# Altium PCB eeg.PcbDoc
Units mil, origin at the board's own origin, x right, y up, seen from the top; angles counter-clockwise.
Board outline 6000 x 4000 mil, 2 copper layers (Top Layer, Bottom Layer); 134 components, 114 nets, 490 pads, 0 vias.
Unrouted connection lines stored in the file: 314.
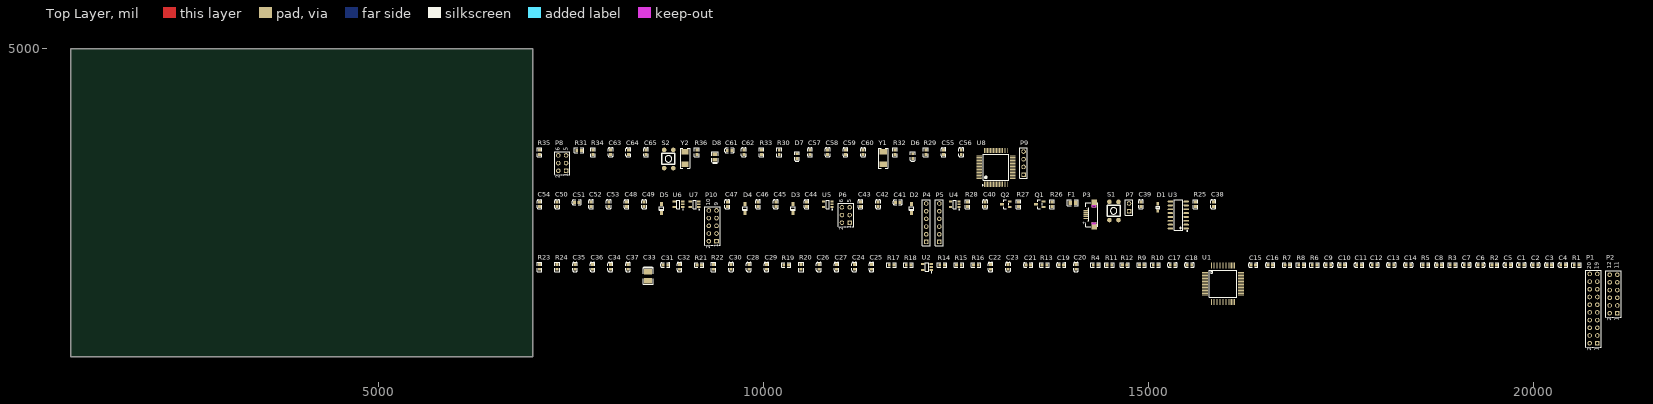
[diagram p0: Top Layer view]
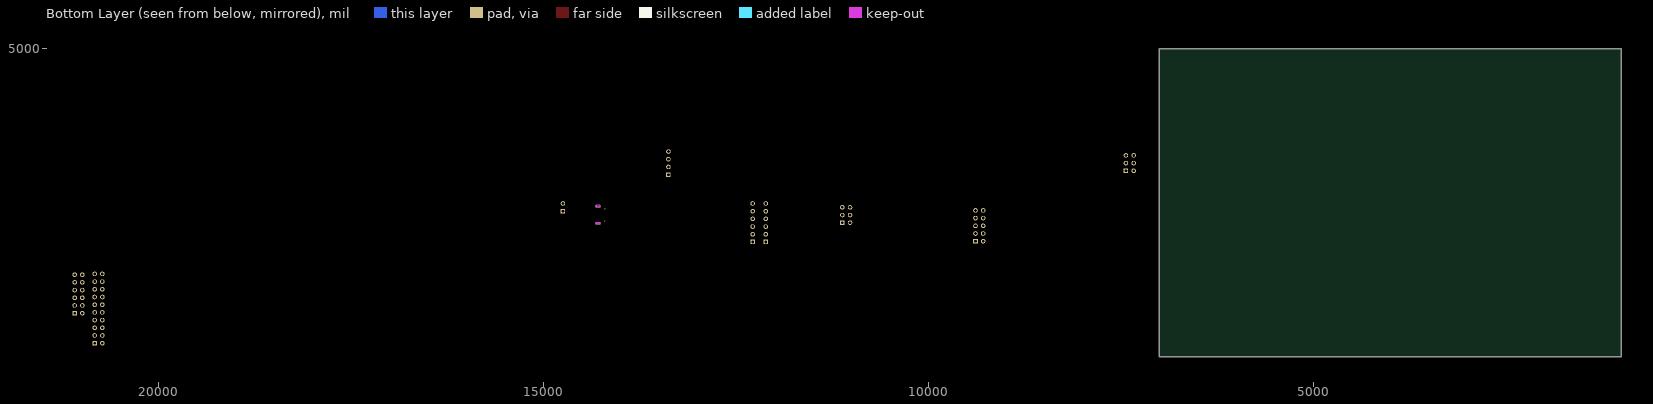
[diagram p1: Bottom Layer view, seen from below]

## Layer stack, top to bottom
Top Solder: solder mask 0.4, Solder Resist, Dk 3.5
Top Layer: signal copper 1.4
Dielectric 1: dielectric 12.6, FR-4, Dk 4.8
Bottom Layer: signal copper 1.4
Bottom Solder: solder mask 0.4, Solder Resist, Dk 3.5

## Board outline
1000,1000 7000,1000 7000,5000 1000,5000

## Design rules (kind name [scope] priority, off if disabled: settings)
Clearance [All] p1: gap=10 ignorepadtopadclearanceinfootprint=FALSE except(0: Arc-Hole Track-Hole SMDPad-Hole THPad-Hole Via-Hole Fill-Hole Poly-Hole Region-Hole Text-Hole)
PolygonConnect [All] p1: connectstyle=Relief reliefconductorwidth=10 reliefentries=4 polygonreliefangle="90 Angle" airgapwidth=10
RoomDefinition stm32f103 [InComponentClass('stm32f103')] p1: confinementstyle=ConfineIn formatcopy=TRUE lockcomponents=FALSE outline 7045,3195 13455,3195 13455,3825 7045,3825
RoomDefinition pwr [InComponentClass('pwr')] p2: confinementstyle=ConfineIn formatcopy=TRUE lockcomponents=FALSE outline 7045,2385 15995,2385 15995,3150 7045,3150
RoomDefinition EEG [InComponentClass('EEG')] p3: confinementstyle=ConfineIn formatcopy=TRUE lockcomponents=FALSE outline 7045,1060 21155,1060 21155,2335 7045,2335
RoutingVias [All] p1: holewidth=28 width=50 viastyle="Through Hole" minholewidth=28 minwidth=50 maxholewidth=28 maxwidth=50
SolderMaskExpansion [All] p1: expansion=4
Width [All] p1: maxlimit=10 minlimit=10 preferedwidth=10
30 further rules are at their usual default settings.

## Classes and differential pairs
component class stm32f103: C55 C56 C57 C58 C59 C60 C61 C62 C63 C64 C65 D6 D7 D8 P8 P9 R29 R30 R31 R32 R33 R34 R35 R36 S2 U8 Y1 Y2
component class pwr: C38 C39 C40 C41 C42 C43 C44 C45 C46 C47 C48 C49 C50 C51 C52 C53 C54 D1 D2 D3 D4 D5 F1 P3 P4 P5 P6 P7 P10 Q1 Q2 R25 R26 R27 R28 S1 U3 U4 U5 U6 U7
component class EEG: C1 C2 C3 C4 C5 C6 C7 C8 C9 C10 C11 C12 C13 C14 C15 C16 C17 C18 C19 C20 C21 C22 C23 C24 C25 C26 C27 C28 C29 C30 C31 C32 C33 C34 C35 C36 C37 P1 P2 R1 R2 R3 R4 R5 R6 R7 R8 R9 R10 R11 R12 R13 R14 R15 R16 R17 R18 R19 R20 R21 R22 R23 R24 U1 U2

## Components (designator, comment, footprint, x,y, rotation, side; value= is the part's Value field where it differs from the comment)
C1 "1uF 50V" 0603_C 19850,2190 r0 top
C2 "100nF 50V" 0603_C 20030,2190 r0 top
C3 "1uF 50V" 0603_C 20210,2190 r0 top
C4 "100nF 50V" 0603_C 20390,2190 r0 top
C5 "1uF 50V" 0603_C 19675,2190 r0 top
C6 "4.7nF 50V" 0603_C 19315,2190 r0 top
C7 "100nF 50V" 0603_C 19135,2190 r0 top
C8 "1.5nF" 0603_C 18780,2190 r0 top
C9 "1uF 50V" 0603_C 17340,2190 r0 top
C10 "100nF 50V" 0603_C 17520,2190 r0 top
C11 "1uF 50V" 0603_C 17740,2190 r0 top
C12 "100nF 50V" 0603_C 17940,2190 r0 top
C13 "1uF 50V" 0603_C 18160,2190 r0 top
C14 "100nF 50V" 0603_C 18380,2190 r0 top
C15 "4.7nF 50V" 0603_C 16365,2190 r0 top
C16 "4.7nF 50V" 0603_C 16585,2190 r0 top
C17 "4.7nF 50V" 0603_C 15315,2190 r0 top
C18 "4.7nF 50V" 0603_C 15535,2190 r0 top
C19 "4.7nF 50V" 0603_C 13870,2190 r0 top
C20 "4.7nF 50V" 0603_C 14060,2165 r90 top
C21 "1uF (105) 10% 50V" 0603_C 13440,2190 r0 top
C22 "4.7nF 50V" 0603_C 12950,2165 r90 top
C23 "4.7nF 50V" 0603_C 13180,2165 r90 top
C24 "4.7nF 50V" 0603_C 11180,2165 r90 top
C25 "4.7nF 50V" 0603_C 11405,2165 r90 top
C26 "4.7nF 50V" 0603_C 10720,2165 r90 top
C27 "4.7nF 50V" 0603_C 10950,2165 r90 top
C28 "1uF 50V" 0603_C 9810,2165 r90 top
C29 "1uF 50V" 0603_C 10040,2165 r90 top
C30 "1uF (105) 10% 50V" 0603_C 9580,2165 r90 top
C31 "4.7nF 50V" 0603_C 8725,2190 r0 top
C32 "4.7nF 50V" 0603_C 8910,2165 r90 top
C33 "100uF (107) ±10% 6.3V" CASE-B_3528 8500,2045 r90 top
C34 "10uF" 0603_C 8010,2165 r90 top
C35 "4.7nF 50V" 0603_C 7550,2165 r90 top
C36 "4.7nF 50V" 0603_C 7780,2165 r90 top
C37 "100nF 50V" 0603_C 8240,2165 r90 top
C38 "10uF (106) 10% 10V" 0603_C 15845,2980 r90 top
C39 "100nF (104) 10% 50V" 0603_C 14905,2980 r90 top
C40 "100nF (104) 10% 50V" 0603_C 12880,2980 r90 top
C41 "1uF" 0603_C 11745,3005 r0 top
C42 "1uF" 0603_C 11490,2980 r90 top
C43 "1nF" 0603_C 11260,2980 r90 top
C44 "1uF" 0603_C 10560,2980 r90 top
C45 "1uF" 0603_C 10160,2980 r90 top
C46 "1nF" 0603_C 9930,2980 r90 top
C47 "1uF" 0603_C 9530,2980 r90 top
C48 "1uF" 0603_C 8220,2980 r90 top
C49 "10nF" 0603_C 8450,2980 r90 top
C50 "1uF" 0603_C 7320,2980 r90 top
C51 "10nF" 0603_C 7575,3005 r0 top
C52 "1uF" 0603_C 7760,2980 r90 top
C53 "10nF" 0603_C 7990,2980 r90 top
C54 "1nF" 0603_C 7090,2980 r90 top
C55 "10uF  10V" 0603_C 12340,3655 r90 top
C56 "100nF  50V" 0603_C 12570,3655 r90 top
C57 "100nF" 0603_C 10605,3655 r90 top
C58 "100nF" 0603_C 10835,3655 r90 top
C59 "100nF" 0603_C 11065,3655 r90 top
C60 "100nF" 0603_C 11295,3655 r90 top
C61 "22pF" 0603_C 9560,3680 r0 top
C62 "22pF" 0603_C 9745,3655 r90 top
C63 "100nF  50V" 0603_C 8015,3655 r90 top
C64 "22pF" 0603_C 8245,3655 r90 top
C65 "22pF" 0603_C 8475,3655 r90 top
D1 "1N4148WS T4" SOD-323 15125,2940 r90 top
D2 "MMSZ4685T1G(3.6V)" SOD-123 11925,2925 r90 top
D3 "MMSZ4683T1G(3V)" SOD-123 10385,2925 r90 top
D4 "B5819W  SL" SOD-123 9760,2925 r90 top
D5 "MMSZ4683T1G(3V)" SOD-123 8675,2925 r90 top
D6 "绿灯 0603" 0603_LED_S1 11940,3605 r90 top
D7 "绿灯 0603" 0603_LED_S1 10435,3605 r90 top
D8 "红灯 0805" 0805_LED_S1 9370,3595 r90 top
F1 "Fuse 1A" 0805_R 14020,3000 r0 top
P1 "Header 10X2" HDR2X10 20835,1175 r90 top
P2 "Header 6X2" HDR2X6 21095,1565 r90 top
P3 "USB" MICRO-USB 14275,2845 r90 top
P4 "ATK_ESP8266_CON" HDR1X6 12115,2490 r90 top
P5 "HC-05_CON" HDR1X6 12285,2490 r90 top
P6 "Header 3X2" HDR2X3 11120,2740 r90 top
P7 "Header 2" HDR1X2 14750,2890 r90 top
P8 "Header 3X2" HDR2X3 7435,3415 r90 top
P9 "SWD" HDR1X4 13380,3365 r90 top
P10 "Header 5X2" HDR2X5 9390,2500 r90 top
Q1 "SS8050 Y1" SOT-23(SOT-23-3) 13590,2980 r0 top
Q2 "SS8550 Y2" SOT-23(SOT-23-3) 13150,2980 r0 top
R1 "0Ω" 0603_R 20565,2190 r0 top
R2 "4.99KΩ (4991) ±1%" 0603_R 19495,2190 r0 top
R3 "1MΩ" 0603_R 18955,2190 r0 top
R4 "10KΩ" 0603_R 14315,2190 r0 top
R5 "10KΩ" 0603_R 18600,2190 r0 top
R6 "100KΩ" 0603_R 17160,2190 r0 top
R7 "4.99KΩ" 0603_R 16805,2190 r0 top
R8 "4.99KΩ" 0603_R 16985,2190 r0 top
R9 "4.99KΩ" 0603_R 14915,2190 r0 top
R10 "4.99KΩ" 0603_R 15095,2190 r0 top
R11 "4.99KΩ" 0603_R 14495,2190 r0 top
R12 "4.99KΩ" 0603_R 14695,2190 r0 top
R13 "10KΩ" 0603_R 13650,2190 r0 top
R14 "4.99KΩ" 0603_R 12320,2190 r0 top
R15 "4.99KΩ" 0603_R 12540,2190 r0 top
R16 "10KΩ" 0603_R 12760,2190 r0 top
R17 "4.99KΩ" 0603_R 11665,2190 r0 top
R18 "4.99KΩ" 0603_R 11885,2190 r0 top
R19 "4.99KΩ" 0603_R 10295,2190 r0 top
R20 "4.99KΩ" 0603_R 10490,2165 r90 top
R21 "4.99KΩ" 0603_R 9165,2190 r0 top
R22 "4.99KΩ" 0603_R 9350,2165 r90 top
R23 "4.99KΩ" 0603_R 7090,2165 r90 top
R24 "4.99KΩ" 0603_R 7320,2165 r90 top
R25 "10KΩ" 0603_R 15615,2980 r90 top
R26 "1KΩ (1001) ±1%" 0603_R 13750,2980 r90 top
R27 "1KΩ (1001) ±1%" 0603_R 13315,2980 r90 top
R28 "1KΩ (1001) ±1%" 0603_R 12650,2980 r90 top
R29 "10Ω (10R0) ±1%" 0603_R 12110,3655 r90 top
R30 "1MΩ" 0603_R 10205,3655 r90 top
R31 "10K" 0603_R 7605,3680 r0 top
R32 "510Ω" 0603_R 11710,3655 r90 top
R33 "510Ω" 0603_R 9975,3655 r90 top
R34 "10KΩ" 0603_R 7785,3655 r90 top
R35 "10KΩ" 0603_R 7090,3655 r90 top
R36 "1KΩ" 0603_R 9135,3655 r90 top
S1 "SW-PB" key_4.5*4.5*3.8 14495,2775 r90 top
S2 "SW-PB" key_4.5*4.5*3.8 8710,3450 r90 top
U1 "ADS1299" ADS1299 15665,2195 r0 top
U2 "OPA376DBV" SOT-23-5 12125,2165 r0 top
U3 "CH340G" SOIC-16_150mil 15390,2840 r90 top
U4 "TPS71733DCKR" SOT-23-5 12485,2980 r0 top
U5 "TPS73225" SOT-23-5 10835,2980 r0 top
U6 "TPS60403" SOT-23-5 8895,2980 r0 top
U7 "TPS72325" SOT-23-5 9105,2980 r0 top
U8 "STM32F103RCT6" LQFP-64_10x10x05P 13020,3460 r0 top
Y1 "8MHz ±20ppm 20pF" SMD-5032_2P 11555,3580 r90 top
Y2 "32.768KHz" SMD-5032_2P 8980,3580 r90 top

## Footprints (in the part's own frame and the unit in brackets; to place one, negate y for a bottom-side part, rotate by r counter-clockwise, add the part's x,y. Pads: shape width x height; smd on the part's side, far side on the other; paste and mask are expansions set on the pad)
0603_C [mm]
  rect 0.93x0.98 smd: 1(-0.77,0) 2(0.77,0)
  silkscreen extent -1.53,-0.79 1.54,0.79, body extent -0.8,-0.4 0.8,0.4, height 0.3
0603_LED_S1 [mm]
  rect 0.93x0.98 smd: A(0.77,0) K(-0.77,0)
  silkscreen extent -1.98,-0.79 1.54,0.79, body extent -0.8,-0.4 0.8,0.4, height 0.6
0603_R [mm]
  rect 0.93x0.98 smd: 1(-0.77,0) 2(0.77,0)
  silkscreen extent -1.53,-0.79 1.54,0.79, body extent -0.85,-0.4 0.85,0.4, height 0.56
0805_LED_S1 [mm]
  rect 1.16x1.47 smd: A(0.89,0) K(-0.89,0)
  silkscreen extent -2.24,-1.04 1.77,1.03, body extent -1.01,-0.62 1.01,0.62, height 1.1
0805_R [mm]
  rect 1.16x1.47 smd: 1(-0.89,0) 2(0.89,0)
  silkscreen extent -1.77,-1.04 1.77,1.03, body extent -1,-0.62 1,0.63, height 0.49
ADS1299 [mm]
  oval 2x0.22 smd: 1(1.778,-2.54)
  rect 2x0.22 smd: 2(1.778,-3.04) 3(1.778,-3.54) 4(1.778,-4.04) 5(1.778,-4.54) 6(1.778,-5.04) 7(1.778,-5.54) 8(1.778,-6.04) 9(1.778,-6.54) 10(1.778,-7.04) 11(1.778,-7.54) 12(1.778,-8.04) 13(1.778,-8.54) 14(1.778,-9.04) 15(1.778,-9.54) 16(1.778,-10.04) 33(13.778,-10.04) 34(13.778,-9.54) 35(13.778,-9.04) 36(13.778,-8.54) 37(13.778,-8.04) 38(13.778,-7.54) 39(13.778,-7.04) 40(13.778,-6.54) 41(13.778,-6.04) 42(13.778,-5.54) 43(13.778,-5.04) 44(13.778,-4.54) 45(13.778,-4.04) 46(13.778,-3.54) 47(13.778,-3.04) 48(13.778,-2.54)
  rect 0.22x2 smd: 17(4.028,-12.29) 18(4.528,-12.29) 19(5.028,-12.29) 20(5.528,-12.29) 21(6.028,-12.29) 22(6.528,-12.29) 23(7.028,-12.29) 24(7.528,-12.29) 25(8.028,-12.29) 26(8.528,-12.29) 27(9.028,-12.29) 28(9.528,-12.29) 29(10.028,-12.29) 30(10.528,-12.29) 31(11.028,-12.29) 32(11.528,-12.29) 49(11.528,-0.29) 50(11.028,-0.29) 51(10.528,-0.29) 52(10.028,-0.29) 53(9.528,-0.29) 54(9.028,-0.29) 55(8.528,-0.29) 56(8.028,-0.29) 57(7.528,-0.29) 58(7.028,-0.29) 59(6.528,-0.29) 60(6.028,-0.29) 61(5.528,-0.29) 62(5.028,-0.29) 63(4.528,-0.29) 64(4.028,-0.29)
  silkscreen extent 3.31,-10.75 12.24,-1.83
CASE-B_3528 [mm]
  rect 1.8x2.6 smd: 1(1.5,0) 2(-1.5,0)
  silkscreen extent -2.73,-1.65 3.16,1.65, body extent -1.85,-1.47 1.85,1.46, height 2.03
HDR1X2 [mm] "Connector; Header; 2 Position"
  rect 1.5x1.5 hole 0.9: 1(0,0)
  round 1.5 hole 0.9: 2(2.54,0)
  silkscreen extent -1.27,-1.27 3.81,1.27
HDR1X4 [mm] "Connector; Header; 4 Position"
  rect 1.5x1.5 hole 0.9: 1(0,0)
  round 1.5 hole 0.9: 2(2.54,0) 3(5.08,0) 4(7.62,0)
  silkscreen extent -1.27,-1.27 8.89,1.27
HDR1X6 [mm] "Connector; Header; 6 Position"
  rect 1.5x1.5 hole 0.9: 1(0,0)
  round 1.5 hole 0.9: 2(2.54,0) 3(5.08,0) 4(7.62,0) 5(10.16,0) 6(12.7,0)
  silkscreen extent -1.27,-1.27 13.97,1.27
HDR2X3 [mm] "Connector; Header; 3x2 Position"
  rect 1.5x1.5 hole 0.9: 1(0,0)
  round 1.5 hole 0.9: 2(0,2.54) 3(2.54,0) 4(2.54,2.54) 5(5.08,0) 6(5.08,2.54)
  silkscreen extent -1.27,-1.27 6.35,3.81
HDR2X5 [mm] "Connector; Header; 5x2 Position"
  rect 1.5x1.5 hole 0.9: 1(0,0)
  round 1.5 hole 0.9: 2(0,2.54) 3(2.54,0) 4(2.54,2.54) 5(5.08,0) 6(5.08,2.54) 7(7.62,0) 8(7.62,2.54) 9(10.16,0) 10(10.16,2.54)
  silkscreen extent -1.27,-1.27 11.43,3.81
HDR2X6 [mm] "Connector; Header; 6x2 Position"
  rect 1.5x1.5 hole 0.9: 1(0,0)
  round 1.5 hole 0.9: 2(0,2.54) 3(2.54,0) 4(2.54,2.54) 5(5.08,0) 6(5.08,2.54) 7(7.62,0) 8(7.62,2.54) 9(10.16,0) 10(10.16,2.54) 11(12.7,0) 12(12.7,2.54)
  silkscreen extent -1.27,-1.27 13.97,3.81
HDR2X10 [mm] "Connector; Header; 10x2 Position"
  rect 1.5x1.5 hole 0.9: 1(0,0)
  round 1.5 hole 0.9: 2(0,2.54) 3(2.54,0) 4(2.54,2.54) 5(5.08,0) 6(5.08,2.54) 7(7.62,0) 8(7.62,2.54) 9(10.16,0) 10(10.16,2.54) 11(12.7,0) 12(12.7,2.54) 13(15.24,0) 14(15.24,2.54) 15(17.78,0) 16(17.78,2.54) 17(20.32,0) 18(20.32,2.54) 19(22.86,0) 20(22.86,2.54)
  silkscreen extent -1.27,-1.27 24.13,3.81
key_4.5*4.5*3.8 [mm]
  round 1.5 smd: 1(0,0) 2(6,0) ""(0,-3) ""(6,-3)
  silkscreen extent 1.27,-3.56 4.83,0.76
LQFP-64_10x10x05P [mm]
  oval 0.28x1.8 smd mask+0.051: 1(-3.75,-5.55) 2(-3.25,-5.55) 3(-2.75,-5.55) 4(-2.25,-5.55) 5(-1.75,-5.55) 6(-1.25,-5.55) 7(-0.75,-5.55) 8(-0.25,-5.55) 9(0.25,-5.55) 10(0.75,-5.55) 11(1.25,-5.55) 12(1.75,-5.55) 13(2.25,-5.55) 14(2.75,-5.55) 15(3.25,-5.55) 16(3.75,-5.55) 33(3.75,5.55) 34(3.25,5.55) 35(2.75,5.55) 36(2.25,5.55) 37(1.75,5.55) 38(1.25,5.55) 39(0.75,5.55) 40(0.25,5.55) 41(-0.25,5.55) 42(-0.75,5.55) 43(-1.25,5.55) 44(-1.75,5.55) 45(-2.25,5.55) 46(-2.75,5.55) 47(-3.25,5.55) 48(-3.75,5.55)
  oval 1.8x0.28 smd mask+0.051: 17(5.55,-3.75) 18(5.55,-3.25) 19(5.55,-2.75) 20(5.55,-2.25) 21(5.55,-1.75) 22(5.55,-1.25) 23(5.55,-0.75) 24(5.55,-0.25) 25(5.55,0.25) 26(5.55,0.75) 27(5.55,1.25) 28(5.55,1.75) 29(5.55,2.25) 30(5.55,2.75) 31(5.55,3.25) 32(5.55,3.75) 49(-5.55,3.75) 50(-5.55,3.25) 51(-5.55,2.75) 52(-5.55,2.25) 53(-5.55,1.75) 54(-5.55,1.25) 55(-5.55,0.75) 56(-5.55,0.25) 57(-5.55,-0.25) 58(-5.55,-0.75) 59(-5.55,-1.25) 60(-5.55,-1.75) 61(-5.55,-2.25) 62(-5.55,-2.75) 63(-5.55,-3.25) 64(-5.55,-3.75)
  silkscreen extent -4.55,-6.05 4.25,4.25
MICRO-USB [mm]
  rect 0.4x1.55 smd: 1(-1.3,2.2) 2(-0.65,2.2) 3(0,2.2) 4(0.65,2.2) 5(1.3,2.2)
  rect 1.8x1.9 smd: 6(-4.05,-0.55) 6(4.05,-0.55)
  rect 0.8x1.5 hole 0.4 slot 1 at 90 deg: 6(-2.825,-0.5) 6(2.825,-0.5)
  round 0.5 hole 0.5 unplated: ""(-2,1.65) ""(2,1.65)
  Keep-Out Layer lines w0.127: -3.054,0.075 -2.596,0.075 -2.596,-1.043 -3.054,-1.043 -3.054,0.075 ; 2.596,0.075 3.054,0.075 3.054,-1.043 2.596,-1.043 2.596,0.075
  silkscreen extent -4.05,-1.8 4,2.3, body extent -4.03,-3.3 4.03,2.28, height 3.13
SMD-5032_2P [mm]
  rect 1.9x2.4 smd: 1(-2.05,0) 2(2.05,0)
  silkscreen extent -3.32,-1.6 3.32,1.6
SOD-123 [mm]
  rect 1.25x1 smd: 1(1.475,0) 2(-1.475,0)
  silkscreen extent -0.5,-0.7 0.5,0.7, body extent -1.85,-0.77 1.85,0.78, height 1.35
SOD-323 [mm]
  rect 1x0.83 smd: 1(1.18,0) 2(-1.18,0)
  silkscreen extent -0.4,-0.6 0.4,0.6, body extent -1.35,-0.62 1.35,0.63, height 1.1
SOIC-16_150mil [mm]
  oval 0.6x1.8 smd: 1(-4.445,-2.6) 2(-3.175,-2.6) 3(-1.905,-2.6) 4(-0.635,-2.6) 5(0.635,-2.6) 6(1.905,-2.6) 7(3.175,-2.6) 8(4.445,-2.6) 9(4.445,2.6) 10(3.175,2.6) 11(1.905,2.6) 12(0.635,2.6) 13(-0.635,2.6) 14(-1.905,2.6) 15(-3.175,2.6) 16(-4.445,2.6)
  silkscreen extent -5.4,-3.05 4.97,1.4
SOT-23(SOT-23-3) [mm]
  rect 1.25x0.7 smd: 1(1.25,-0.95) 2(1.25,0.95) 3(-1.25,0)
  silkscreen extent -0.65,-1.46 0.9,1.46, body extent -1.5,-1.5 1.5,1.5, height 1.3
SOT-23-5 [mm]
  rect 1.1x0.6 smd: 1(1.4,-0.95) 2(1.4,0) 3(1.4,0.95) 4(-1.4,0.95) 5(-1.4,-0.95)
  silkscreen extent -0.5,-1.87 1.63,1.4

## Part data
C1 C2 C3 C4 C5 C7 C8 C9 C10 C11 C12 C13 C14 C28 C29 C37 C49 C51 C53: library part "0603 10nF (103) 10% 50V", "贴片电容", Package=0603, SuppliersPartNumber=C57112, ComponentLink1Description=供应商链接, ComponentLink1URL=http://www.szlcsc.com/product/details_58143.html, Supplier=LC
C6 C15 C16 C17 C18 C19 C20 C22 C23 C24 C25 C26 C27 C31 C32 C35 C36: library part "0603 4.7nF (472) 10% 50V", "贴片电容", Package=0603, SuppliersPartNumber=C53987, ComponentLink1Description=供应商链接, ComponentLink1URL=http://www.szlcsc.com/product/details_55004.html, Supplier=LC
C21 C30 C41 C42 C44 C45 C47 C48 C50 C52: library part "0603 1uF (105) 10% 50V", "贴片电容", Package=0603, SuppliersPartNumber=C15849, ComponentLink1Description=供应商链接, ComponentLink1URL=http://www.szlcsc.com/product/details_16531.html, Supplier=LC
C33: library part "3528 100uF (107) 10% 6.3V", "钽电容", Package=3528, SuppliersPartNumber=C16133, ComponentLink1Description=供应商链接, ComponentLink1URL=http://www.szlcsc.com/product/details_16815.html, Supplier=LC
C34 C38 C55: library part "0603 10uF (106) 10% 10V", "贴片电容", Package=0603, SuppliersPartNumber=C19702, ComponentLink1Description=供应商链接, ComponentLink1URL=http://www.szlcsc.com/product/details_20411.html, Supplier=LC
C39 C40 C56 C57 C58 C59 C60 C63: library part "0603 100nF (104) 10% 50V", "贴片电容", Package=0603, SuppliersPartNumber=C14663, ComponentLink1Description=供应商链接, ComponentLink1URL=http://www.szlcsc.com/product/details_15331.html, Supplier=LC
C43 C46 C54: library part "0603 1nF (102) 10% 50V", "贴片电容", Package=0603, SuppliersPartNumber=C1588, ComponentLink1Description=供应商链接, ComponentLink1URL=http://www.szlcsc.com/product/details_1940.html, Supplier=LC
C61 C62: library part "0603 22pF (220) 5% 50V", "贴片电容", Package=0603, SuppliersPartNumber=C1653, ComponentLink1Description=供应商链接, ComponentLink1URL=http://www.szlcsc.com/product/details_2005.html, Supplier=LC
C64 C65: library part "0603 10pF (100) 5% 50V", "贴片电容", Package=0603, SuppliersPartNumber=C1634, ComponentLink1Description=供应商链接, ComponentLink1URL=http://www.szlcsc.com/product/details_1986.html, Supplier=LC
D1: library part "SOD-323 1N4148WS T4", "二极管", Package=SOD-323, SuppliersPartNumber=C2128, ComponentLink1Description=供应商链接, ComponentLink1URL=http://www.szlcsc.com/product/details_2485.html, Supplier=LC
D2 D3 D4 D5: library part "SOD-123 B5819W  SL", "肖特基二极管", Package=SOD-123, SuppliersPartNumber=C8598, ComponentLink1Description=供应商链接, ComponentLink1URL=http://www.szlcsc.com/product/details_9093.html, Supplier=LC
D6 D7: library part "0603 绿灯", "发光二极管", Package=0603, SuppliersPartNumber=C72043, ComponentLink1Description=供应商链接, ComponentLink1URL=http://www.szlcsc.com/product/details_73152.html, Supplier=LC
D8: library part "0805 红灯", "发光二极管", Package=0805, SuppliersPartNumber=C2295, ComponentLink1Description=供应商链接, ComponentLink1URL=http://www.szlcsc.com/product/details_2668.html, Supplier=LC
F1: library part "Fuse 2", "Fuse", LatestRevisionDate=17-Jul-2002, LatestRevisionNote="Re-released for DXP Platform.", PackageDescription="Thru-Hole; 2 Leads", PackageReference=PIN-W2/E2.8, Published=8-Jun-2000, Publisher="Altium Limited"
P1: "Header, 10-Pin, Dual row", LatestRevisionDate=17-Jul-2002, LatestRevisionNote="Re-released for DXP Platform.", Publisher="Altium Limited"
P2: "Header, 6-Pin, Dual row", LatestRevisionDate=17-Jul-2002, LatestRevisionNote="Re-released for DXP Platform.", Publisher="Altium Limited"
P3: library part "Header 5", "Header, 5-Pin", LatestRevisionDate=17-Jul-2002, LatestRevisionNote="Re-released for DXP Platform.", Publisher="Altium Limited"
P4 P5: library part "Header 6", "Header, 6-Pin", LatestRevisionDate=17-Jul-2002, LatestRevisionNote="Re-released for DXP Platform.", Publisher="Altium Limited"
P6 P8: "Header, 3-Pin, Dual row", LatestRevisionDate=17-Jul-2002, LatestRevisionNote="Re-released for DXP Platform.", Publisher="Altium Limited"
P7: "Header, 2-Pin", LatestRevisionDate=17-Jul-2002, LatestRevisionNote="Re-released for DXP Platform.", Publisher="Altium Limited"
P9: library part "Header 4", "Header, 4-Pin", LatestRevisionDate=17-Jul-2002, LatestRevisionNote="Re-released for DXP Platform.", Publisher="Altium Limited"
P10: "Header, 5-Pin, Dual row", LatestRevisionDate=17-Jul-2002, LatestRevisionNote="Re-released for DXP Platform.", Publisher="Altium Limited"
Q1: library part "SOT-23 SS8050 Y1", "三极管", Package=SOT-23, SuppliersPartNumber=C2150, ComponentLink1Description=供应商链接, ComponentLink1URL=http://www.szlcsc.com/product/details_2507.html, Supplier=LC
Q2: library part "SOT-23 SS8550 Y2", "三极管", Package=SOT-23, SuppliersPartNumber=C8542, ComponentLink1Description=供应商链接, ComponentLink1URL=http://www.szlcsc.com/product/details_9037.html, Supplier=LC
R1 R3 R6: library part "0603 100KΩ (1003) 1%", "贴片电阻", Package=0603, SuppliersPartNumber=C25803, ComponentLink1Description=供应商链接, ComponentLink1URL=http://www.szlcsc.com/product/details_26546.html, Supplier=LC
R2 R7 R8 R9 R10 R11 R12 R14 R15 R17 R18 R19 R20 R21 R22 R23 R24: library part "0603 4.99KΩ (4991) 1%", "贴片电阻", Package=0603, SuppliersPartNumber=C23046, ComponentLink1Description=供应商链接, ComponentLink1URL=http://www.szlcsc.com/product/details_23773.html, Supplier=LC
R4 R5 R13 R16 R34 R35: library part "0603 10KΩ (1002) 1%", "贴片电阻", Package=0603, SuppliersPartNumber=C25804, ComponentLink1Description=供应商链接, ComponentLink1URL=http://www.szlcsc.com/product/details_26547.html, Supplier=LC
R25 R26 R27 R28 R36: library part "0603 1KΩ (1001) 1%", "贴片电阻", Package=0603, SuppliersPartNumber=C21190, ComponentLink1Description=供应商链接, ComponentLink1URL=http://www.szlcsc.com/product/details_21904.html, Supplier=LC
R29 R31: library part "0603 10Ω (10R0) 1%", "贴片电阻", Package=0603, SuppliersPartNumber=C22859, ComponentLink1Description=供应商链接, ComponentLink1URL=http://www.szlcsc.com/product/details_23586.html, Supplier=LC
R30: library part "0603 1.2MΩ (1204) 1%", "贴片电阻", Package=0603, SuppliersPartNumber=C22766, ComponentLink1Description=供应商链接, ComponentLink1URL=http://www.szlcsc.com/product/details_23493.html, Supplier=LC
R32 R33: library part "0603 510Ω (5100) 1%", "贴片电阻", Package=0603, SuppliersPartNumber=C23193, ComponentLink1Description=供应商链接, ComponentLink1URL=http://www.szlcsc.com/product/details_23920.html, Supplier=LC
S1 S2: "Switch", LatestRevisionDate=17-Jul-2002, LatestRevisionNote="Re-released for DXP Platform.", PackageDescription="Switch; 2 Leads", PackageReference=SPST-2, Published=24-Mar-1999, Publisher="Altium Limited"
U3: library part CH340G_[C14267], "USB", Package=SOIC-16_150mil, SuppliersPartNumber=C14267, ComponentLink1Description=供应商链接, ComponentLink1URL=http://www.szlcsc.com/product/details_14927.html, Supplier=LC
U8: "ARM", Package=LQFP-64_10x10x05P, SuppliersPartNumber=C8323, ComponentLink1Description=供应商链接, ComponentLink1URL=http://www.szlcsc.com/product/details_8815.html, Supplier=LC
Y1 Y2: library part "SMD-5032_2P 8MHz 20ppm 20pF", "贴片晶振", Package=SMD-5032_2P, SuppliersPartNumber=C115962, ComponentLink1Description=供应商链接, ComponentLink1URL=http://www.szlcsc.com/product/details_117214.html, Supplier=LC

## Nets (pads, with @x,y where several pads share a name; then routed paths per layer and width w, separated by ;. In a path a pad name is that pad's centre, name@x,y a point inside that pad or via, vN(x,y) a via of type N, cw(c..) or ccw(c..) an arc to the next point about the centre after c; other vN are vias at no path point)
+5V: C38.1 C39.1 U3.16
AGND: C6.1 C9.2 C10.2 C11.2 C12.2 C15.1 C16.1 C17.2 C18.2 C19.1 C20.1 C21.2 C22.2 C23.2 C24.1 C25.1 C26.2 C27.2 C30.1 C31.1 C32.1 C35.2 C36.2 C38.2 C39.2 C40.1 C41.1 C42.1 C44.1 C45.1 C46.1 C48.2 C49.1 C50.2 C51.1 C52.2 C53.1 C54.1 C55.1 C56.1 C57.1 C58.1 C59.1 C60.1 C61.1 C62.1 C63.1 C64.1 C65.1 D3.1 D5.2 D8.K P1.1 P1.2 P3.5 P4.2 P5.4 P7.2 P9.4 P10.2 P10.4 P10.6 P10.8 R1.2 R29.2 S2.2 U3.1 U4.2 U5.2 U6.4 U7.1 U8.12 U8.18 U8.31 U8.47 U8.63
AIN1N: C17.1 R9.2 U1.15
AIN1P: C15.2 R7.2 U1.16
AIN2N: C18.1 R10.2 U1.13
AIN2P: C16.2 R8.2 U1.14
AIN3N: C22.1 R14.2 U1.11
AIN3P: C19.2 R11.2 U1.12
AIN4N: C23.1 R15.2 U1.9
AIN4P: C20.2 R12.2 U1.10
AIN5N: C26.1 R19.2 U1.7
AIN5P: C24.2 R17.2 U1.8
AIN6N: C27.1 R20.2 U1.5
AIN6P: C25.2 R18.2 U1.6
AIN7N: C35.1 R23.2 U1.3
AIN7P: C31.2 R21.2 U1.4
AIN8N: C36.1 R24.2 U1.1
AIN8P: C32.2 R22.2 U1.2
AVDD: C1.1 C2.1 C3.1 C4.1 C9.1 C10.1 C30.2 C45.2 D3.2 P10.9 U1.19 U1.21 U1.22 U1.54 U1.56 U1.59 U2.5 U5.5
AVSS: C1.2 C2.2 C3.2 C4.2 C5.2 C7.2 C11.1 C12.1 C21.1 C28.2 C29.2 C33.2 C34.1 C37.2 C48.1 C49.2 D5.1 P10.10 U1.20 U1.23 U1.25 U1.32 U1.53 U1.57 U1.58 U2.2 U7.5
BLE_RX: P5.2 P6.5
BLE_TX: P5.3 P6.6
BOOT0: R28.2 R34.1 U8.60
BOOT1: R35.2 U8.28
C\S\: P2.7 R13.2
CH340_D+: P3.3 U3.5
CH340_D-: P3.2 U3.6
D\R\D\Y\: P2.1 U1.47
DGND: C13.2 C14.2 R1.1 U1.31 U1.33 U1.38 U1.49 U1.51
DIN: P2.11 R16.2
DOUT: P2.3 U1.43
DVDD: C13.1 C14.1 R5.1 U1.48 U1.50
GND: P8.5 P8.6
IN1N: P1.4 R9.1
IN1P: P1.3 R7.1
IN2N: P1.6 R10.1
IN2P: P1.5 R8.1
IN3N: P1.8 R14.1
IN3P: P1.7 R11.1
IN4N: P1.10 R15.1
IN4P: P1.9 R12.1
IN5N: P1.12 R19.1
IN5P: P1.11 R17.1
IN6N: P1.14 R20.1
IN6P: P1.13 R18.1
IN7N: P1.16 R23.1
IN7P: P1.15 R21.1
IN8N: P1.18 R24.1
IN8P: P1.17 R22.1
LED0: D6.K U8.24
LED1: D7.K U8.25
NetC5_1: C5.1 C7.1 U1.55
NetC8_1: C8.1 R3.1 R6.2 U1.62 U1.63
NetC8_2: C8.2 R3.2 U1.61
NetC28_1: C28.1 U1.26
NetC29_1: C29.1 U1.30
NetC33_1: C33.1 U1.28
NetC34_2: C34.2 C37.1 U1.24
NetC40_2: C40.2 U3.4
NetC43_1: C43.1 D2.1
NetC43_2: C43.2 U4.4
NetC46_2: C46.2 U5.4
NetC47_1: C47.1 U6.5
NetC47_2: C47.2 U6.3
NetC50_1: C50.1 C51.2 D4.2 U6.2
NetC52_1: C52.1 C53.2 U6.1 U7.2 U7.3
NetC54_2: C54.2 U7.4
NetC55_2: C55.2 C56.2 U8.13
NetC61_2: C61.2 R30.1 U8.6 Y1.1
NetC62_2: C62.2 R30.2 U8.5 Y1.2
NetC64_2: C64.2 U8.3 Y2.2
NetC65_2: C65.2 U8.4 Y2.1
NetD1_2: D1.2 Q1.3 R25.2
NetD6_A: D6.A R32.2
NetD7_A: D7.A R33.2
NetD8_A: D8.A R36.2
NetF1_1: F1.1 S1.2
NetF1_2: F1.2 P7.1
NetP8_4: P8.4 R35.1
NetQ1_1: Q1.1 R26.2
NetQ1_2: Q1.2 R27.2 U3.14
NetQ2_1: Q2.1 R27.1
NetQ2_3: Q2.3 R28.1
NetR4_1: R4.1 U1.40
NetR5_2: R5.2 U1.52
NetR13_1: R13.1 U1.39
NetR16_1: R16.1 U1.34
NetR26_1: R26.1 U3.13
P\W\D\N\: P2.9 U1.35 U1.36
PB8: P4.5 U8.61
PB9: P4.6 U8.62
PC0: P2.2 U8.8
PC1: P2.8 U8.9
PC2: P2.10 U8.10
REF_ELEC: C6.2 R2.2 U2.3
REF_ELEC_CON: P1.20 R2.1
RESET: C63.2 D1.1 R31.2 S2.1 U8.7
RL: P1.19 R6.1
SCLK: P2.5 R4.2
SPI3_MISO: P2.4 U8.56
SPI3_MOSI: P2.12 U8.57
SPI3_SCK: P2.6 U8.55
SRB1: U1.17 U2.1 U2.4
SWCLK: P9.3 U8.49
SWDIO: P9.2 U8.46
USART1_RX: U3.2 U8.43
USART1_TX: U3.3 U8.42
USART2_RX: P6.4 U8.17
USART2_TX: P6.3 U8.16
USB_5V: P3.1
VCC: C41.2 C44.2 D4.1 P4.1 P5.5 P10.1 P10.3 S1.1 U4.1 U4.3 U5.1 U5.3
VCC3.3: C42.2 C57.2 C58.2 C59.2 C60.2 D2.2 P8.1 P8.2 P8.3 P9.1 P10.5 P10.7 Q2.2 R25.1 R29.1 R31.1 R32.1 R33.1 R34.2 R36.1 U4.5 U8.19 U8.32 U8.48 U8.64
WIFI_RX: P4.4 P6.1
WIFI_TX: P4.3 P6.2
pads on no net: P3. P3.4 P3.6 P5.1 P5.6 S1. S2. U1.18 U1.27 U1.29 U1.37 U1.41 U1.42 U1.44 U1.45 U1.46 U1.60 U1.64 U3.7 U3.8 U3.9 U3.10 U3.11 U3.12 U3.15 U8.1 U8.2 U8.11 U8.14 U8.15 U8.20 U8.21 U8.22 U8.23 U8.26 U8.27 U8.29 U8.30 U8.33 U8.34 U8.35 U8.36 U8.37 U8.38 U8.39 U8.40 U8.41 U8.44 U8.45 U8.50 U8.51 U8.52 U8.53 U8.54 U8.58 U8.59

## Text inside footprints (layer, text, board x,y; h text height)
P1: Top Overlay "20" at 20755,2135 h50 r90; Top Overlay "19" at 20855,2135 h50 r90; Top Overlay "1" at 20855,1075 h50 r90; Top Overlay "2" at 20755,1075 h50 r90
P2: Top Overlay "12" at 21015,2145 h50 r90; Top Overlay "1" at 21115,2185 h50 r90; Top Overlay "1" at 21115,2145 h50 r90; Top Overlay "1" at 21115,1465 h50 r90; Top Overlay "2" at 21015,1465 h50 r90
P3: Top Overlay "+" at 14182.48,2715.08 h39.37 r90
P6: Top Overlay "6" at 11040,3000 h50 r90; Top Overlay "5" at 11140,3000 h50 r90; Top Overlay "2" at 11040,2640 h50 r90; Top Overlay "1" at 11140,2660 h50 r90
P8: Top Overlay "6" at 7355,3675 h50 r90; Top Overlay "5" at 7455,3675 h50 r90; Top Overlay "2" at 7355,3315 h50 r90; Top Overlay "1" at 7455,3335 h50 r90
P10: Top Overlay "10" at 9310,2960 h50 r90; Top Overlay "9" at 9410,2960 h50 r90; Top Overlay "1" at 9410,2420 h50 r90; Top Overlay "2" at 9310,2400 h50 r90